# Allegro board ANDRONE_Ionut_PCB.brd
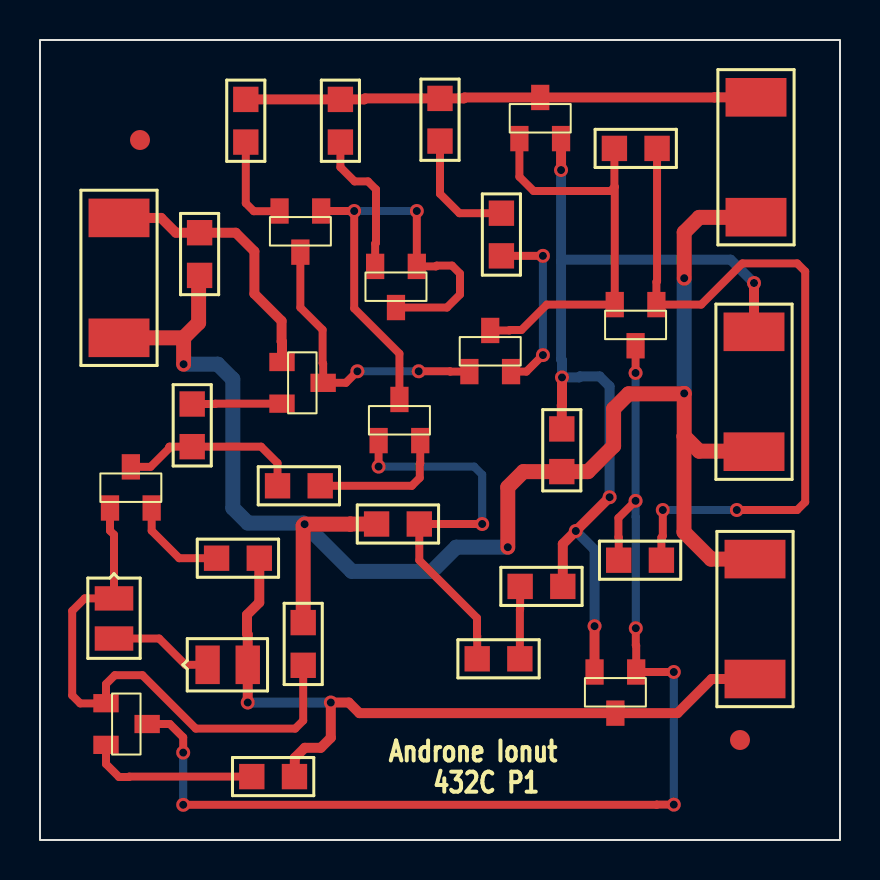
[diagram p0: board, top side]
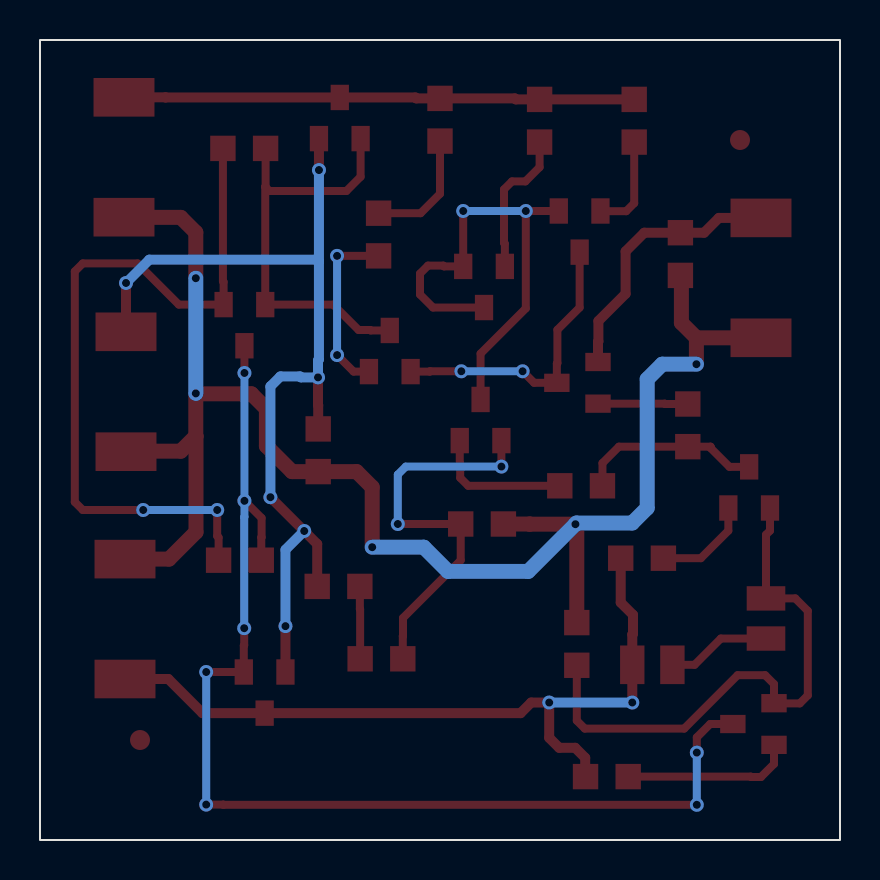
[diagram p1: board, bottom side, seen from below]

Outline 40 x 40 mm; copper layers: TOP, BOTTOM. Coordinates in mm from the lower left corner of the outline.
Outline path: rectangle 0,0 40,40

## Design rules (mm)
nets with their own width: min track width 0.4; nets N24353 N24383 N24433 N24473 N24517 N24583 N24589 N24689 N24901 N24907 N24979 N25139 N25245 N25267 N25293 N25307 N31467 N31514
nets with their own width: min track width 0.5; nets V+ V- VIN VOUT
nets with their own width: min track width 0.75; nets 0

## Placement (name value [footprint] x y rotation side)
J1  CON2  [SMR2512]  3.95 25.11 90 top
J2  CON2  [SMR2512]  35.75 8.05 90 top
J3  CON2  [SMR2512]  35.8 31.14 90 top
J4  CON2  [SMR2512]  35.7 25.41 270 top
NOREF  -  [unnamed]  5 35 0 top
NOREF#2  -  [unnamed]  35 5 0 top
Q1  QBC856B  [TO236AA]  12.1 23.9 180 top
Q2  QBC856B  [TO236AA]  16.93 19.97 270 top
Q3  QBC846B  [TO236AA]  14.06 31.45 90 top
Q4  QBC846B  [TO236AA]  18.84 28.68 90 top
Q5  QBC856B  [TO236AA]  3.5 16.6 270 top
Q6  QBC846B  [TO236AA]  21.47 23.42 270 top
Q7  QBC856B  [TO236AA]  3.3 6.84 180 top
Q8  QBC846B  [TO236AA]  29.81 8.4 90 top
Q9  QBC856B  [TO236AA]  23.97 35.07 270 top
Q10  QBC846B  [TO236AA]  30.82 26.77 90 top
R1  68  [SMR0805]  7.61 21.8 270 top
R2  68  [SMR0805]  14.01 17.71 180 top
R3  68  [SMR0805]  10.29 37.03 270 top
R4  68  [SMR0805]  15.02 37.03 270 top
R5  330  [SMR0805]  8.83 14.09 0 top
R6  68  [SMR0805]  10.59 3.17 0 top
R7  1k  [SMR0805]  16.83 15.8 0 top
R8  2k  [SMR0805]  21.86 9.06 0 top
R9  1.5k  [SMR0805]  26.14 12.68 180 top
R10  100  [SMR0805]  31.07 13.99 180 top
R11  100  [SMR0805]  28.72 34.58 0 top
R12  100k  [SMR0805]  7.98 28.23 90 top
R13  330  [SMR0805]  13.16 10.87 270 top
R14  10  [SMR0805]  23.07 31.34 270 top
R15  10  [SMR0805]  20 37.08 270 top
R16  1  [SMR0805]  26.09 18.42 90 top
U1  1N4148  [SMD0805]  3.7 12.08 270 top
U2  1N4148  [SMD0805]  8.38 8.76 0 top

## Library data of the parts
J1-J4 = CON2
Q1 Q2 Q5 Q7 Q9 = QBC856B_1
Q3 Q4 Q6 Q8 Q10 = QBC846B_2
R1-R16 = R_0
U1 U2 = 1N4148_11

## Footprints (pads in the part's own frame, mm; a bottom-side part is the same pattern mirrored in y, then rotated)
SMD0805
  rect 1.219x1.93 smd: A(2.007,0) C(0,0)
SMR0805
  rect 1.27x1.27 smd: 1(0,0) 2(2.134,0)
SMR2512
  rect 1.93x3.048 smd: 1(0,0) 2(5.994,0)
TO236AA
  rect 1.27x0.914 smd: 1(0,0) 2(0,2.083) 3(-2.057,1.041)
unnamed
  round 1 smd: (0,0)

## Nets
VIN: J1.2 Q1.1(B) R12.2
0: J1.1 J2.2 J3.1 J4.2 R7.1 R12.1 R13.1 R16.1
V+: J2.1 Q8.3(C) R5.2 R6.2 U2.A(ANODE)
V-: J3.2 Q9.3(C) R3.1 R4.1 R15.1
VOUT: J4.1 Q8.2(E) Q9.2(E) R9.1 R16.2
N24353: Q1.3(C) Q3.3(C) Q6.1(B)
N24383: Q2.3(C) Q3.1(B) Q4.1(B) Q4.3(C)
N24433: Q1.2(E) R1.1
N24473: Q3.2(E) R3.2
N24517: Q5.3(C) R1.2 R2.2
N24583: Q5.1(B) Q7.1(B) R13.2 U1.C(CATHODE)
N24589: Q5.2(E) R5.1
N24689: Q7.2(E) R6.1
N24901: Q7.3(C) Q8.1(B) Q10.3(C) R10.2
N24907: Q6.3(C) Q9.1(B) Q10.2(E) R11.1
N24979: Q10.1(B) R10.1 R11.2
N25139: Q2.1(B) R7.2 R8.1
N25245: R8.2 R9.2
N25267: Q4.2(E) R4.2
N25293: U1.A(ANODE) U2.C(CATHODE)
N25307: Q2.2(E) R2.1
N31467: Q6.2(E) R14.2
N31514: R14.1 R15.2

## Via types
v1: diameter 0.7, hole 0.4, TOP to BOTTOM, 30 vias

## Routing (per net, layer and track width the routed paths; a pad name or vN(x,y) marks a point on that pad's centre or on a via; arc(x,y) is an arc through that point)
VIN: length 13.6
  TOP w0.5: Q1.1 12.1,24.91 12.08,24.93 12.08,25.95 10.72,27.31 10.72,29.43 9.79,30.36 R12.2 6.79,30.36 6.05,31.1 J1.2
0: length 83
  TOP w0.75: J2.2 33.55,14.04 32.2,15.4 32.2,20.18 32.21,20.19 ; R12.1 7.93,28.18 7.93,25.86 7.18,25.11 ; v1(23.39,14.64) 23.39,17.64 24.17,18.42 R16.1 27.4,18.42 28.68,19.7 28.68,21.56 29.43,22.31 32.19,22.31 v1(32.21,22.33) 32.21,20.19 ; R7.1 15.52,15.8 15.51,15.79 v1(13.23,15.79) 13.16,15.72 R13.1 ; 32.21,20.19 32.96,19.44 35.68,19.44 J4.2 ; J1.1 7.18,25.11 ; 7.18,25.11 v1(7.18,23.79) ; v1(32.21,28.09) 32.21,30.38 32.96,31.13 35.79,31.13 J3.1
  BOTTOM w0.75: v1(7.18,23.79) 8.89,23.79 9.64,23.04 9.64,16.6 10.39,15.85 13.17,15.85 v1(13.23,15.79) 15.59,13.43 19.6,13.43 20.81,14.64 v1(23.39,14.64) ; v1(32.21,28.09) v1(32.21,22.33)
V+: length 38.7
  TOP w0.5: R5.2 10.96,11.87 10.35,11.26 10.35,10.31 10.39,10.28 U2.A v1(10.39,6.87) ; J2.1 33.58,8.05 31.88,6.34 Q8.3 15.97,6.34 15.44,6.87 v1(14.54,6.87) 14.54,5.11 14.04,4.61 13.24,4.61 12.74,4.11 12.74,3.19 R6.2
  BOTTOM w0.5: v1(10.39,6.87) v1(14.54,6.87)
V-: length 25.6
  TOP w0.5: R3.1 R4.1 16.2,37.03 16.25,37.08 R15.1 21.18,37.08 21.23,37.13 Q9.3 33.72,37.13 33.73,37.13 J3.2
VOUT: length 48.2
  TOP w0.5: v1(28.48,17.14) v1(26.79,15.45) 26.14,14.8 R9.1 ; J4.1 v1(35.7,27.85) ; Q8.2 v1(27.73,10.69) ; v1(26.1,23.13) 26.1,21.75 26.09,21.74 R16.2 ; Q9.2 v1(26.05,33.5)
  BOTTOM w0.5: v1(26.05,33.5) 26.05,28.93 ; 26.05,28.93 26.14,29.02 34.53,29.02 v1(35.7,27.85) ; 26.05,28.93 26.05,24.03 26.1,23.98 v1(26.1,23.13) 26.95,23.13 27,23.18 27.98,23.18 28.48,22.68 v1(28.48,17.14) ; v1(27.73,10.69) 27.73,14.51 v1(26.79,15.45)
N24353: length 14.6
  TOP w0.4: Q3.3 13.02,26.62 14.13,25.51 14.13,23.84 14.16,23.82 Q1.3 15.29,22.86 v1(15.87,23.44) ; Q6.1 20.51,23.42 20.5,23.44 v1(18.93,23.44)
  BOTTOM w0.4: v1(15.87,23.44) v1(18.93,23.44)
N24383: length 24.8
  TOP w0.4: Q3.1 v1(15.71,31.45) 15.71,26.58 17.97,24.32 Q2.3 ; Q4.3 20.35,26.62 21,27.28 21,28.32 20.6,28.72 19.84,28.72 19.8,28.68 Q4.1 v1(18.84,31.45)
  BOTTOM w0.4: v1(18.84,31.45) v1(15.71,31.45)
N24433: length 4.5
  TOP w0.4: R1.1 8.74,21.8 8.76,21.82 Q1.2
N24473: length 4.9
  TOP w0.4: Q3.2 11.97,31.44 10.69,31.44 10.29,31.84 R3.2
N24517: length 9.3
  TOP w0.4: Q5.3 5.53,18.66 6.47,19.6 6.47,19.66 6.47,19.67 R1.2 11.05,19.67 11.88,18.84 R2.2
N24583: length 28.1
  TOP w0.4: R13.2 13.16,5.97 12.76,5.57 7.79,5.57 5.12,8.24 3.74,8.24 3.3,7.8 Q7.1 3.29,6.83 2.01,6.83 1.61,7.23 1.61,11.46 2.23,12.08 U1.C 3.7,15.27 3.5,15.46 Q5.1
N24589: length 5
  TOP w0.4: Q5.2 5.58,15.46 6.96,14.09 R5.1
N24689: length 8.5
  TOP w0.4: R6.1 4.46,3.17 4.44,3.15 3.95,3.15 3.3,3.8 Q7.2
N24901: length 58.2
  TOP w0.4: v1(7.16,1.76) 30.83,1.76 30.84,1.77 v1(31.69,1.77) ; v1(29.78,16.96) 28.92,16.1 28.92,15.14 28.94,15.12 R10.2 ; v1(7.16,4.37) 7.16,5.13 6.49,5.8 Q7.3 ; Q10.3 v1(29.78,23.35) ; v1(29.79,10.59) 29.79,9.74 29.81,9.72 Q8.1 v1(31.69,8.4)
  BOTTOM w0.4: v1(29.79,10.59) 29.79,16.15 29.78,16.16 v1(29.78,16.96) v1(29.78,23.35) ; v1(7.16,4.37) v1(7.16,1.76) ; v1(31.69,8.4) v1(31.69,1.77)
N24907: length 21.6
  TOP w0.4: 28.74,32.66 28.53,32.45 24.68,32.45 23.97,33.16 Q9.1 ; 28.74,32.66 Q10.2 25.34,26.77 24.07,25.5 23.49,25.5 23.47,25.48 Q6.3 ; 28.74,32.66 28.72,32.68 R11.1
N24979: length 37.6
  TOP w0.4: v1(31.14,16.5) 31.14,15.2 31.07,15.12 R10.1 ; v1(34.84,16.5) 37.86,16.5 38.26,16.9 38.26,28.43 37.86,28.83 35.12,28.83 33.06,26.77 Q10.1 30.82,27.91 30.85,27.94 R11.2
  BOTTOM w0.4: v1(34.84,16.5) v1(31.14,16.5)
N25139: length 20.2
  TOP w0.4: R8.1 21.86,10.2 21.85,10.21 21.85,11.1 18.96,13.99 R7.2 v1(22.11,15.8) ; Q2.1 v1(16.93,18.67)
  BOTTOM w0.4: v1(16.93,18.67) 21.71,18.67 22.11,18.27 v1(22.11,15.8)
N25245: length 3.6
  TOP w0.4: R9.2 24.01,11.54 23.99,11.53 R8.2
N25267: length 7.4
  TOP w0.4: Q4.2 16.76,29.82 16.8,29.86 16.8,32.53 16.4,32.93 15.73,32.93 15.02,33.64 R4.2
N25293: length 5.2
  TOP w0.4: U1.A 5.96,10.07 7.27,8.76 U2.C
N25307: length 7
  TOP w0.4: R2.1 18.59,17.71 18.99,18.11 18.99,18.81 19.01,18.84 Q2.2
N31467: length 9
  TOP w0.4: R14.2 v1(25.15,29.21) ; v1(25.15,24.25) 24.32,23.42 Q6.2
  BOTTOM w0.4: v1(25.15,29.21) v1(25.15,24.25)
N31514: length 6.1
  TOP w0.4: R14.1 20.97,31.34 20,32.31 R15.2

## Text on the board
Ref Des/Silkscreen Top: Androne Ionut | 432C P1
XSECTION_CHART: *  SURFACE - AIR 0 MM | L1: TOP CONDUCTOR - COPPER 0.018 MM | *  DIELECTRIC - FR-4 1.5 MM | L2: BOTTOM CONDUCTOR - COPPER 0.018 MM | DESIGN CROSS SECTION CHART | ___________________________ | TOTAL THICKNESS 1.536 MM | 1-2 | FIGURE | SIZE | 0.4 | DRILL CHART: TOP to BOTTOM | ALL UNITS ARE IN MILLIMETERS | PLATED | QTY | 30
